# Altium PCB top board.PcbDoc
Units mm, origin at the board's own origin, x right, y up, seen from the top; angles counter-clockwise.
Board outline 77 x 77 mm, 2 copper layers (Top Layer, Bottom Layer); 64 components, 49 nets, 215 pads, 156 vias.
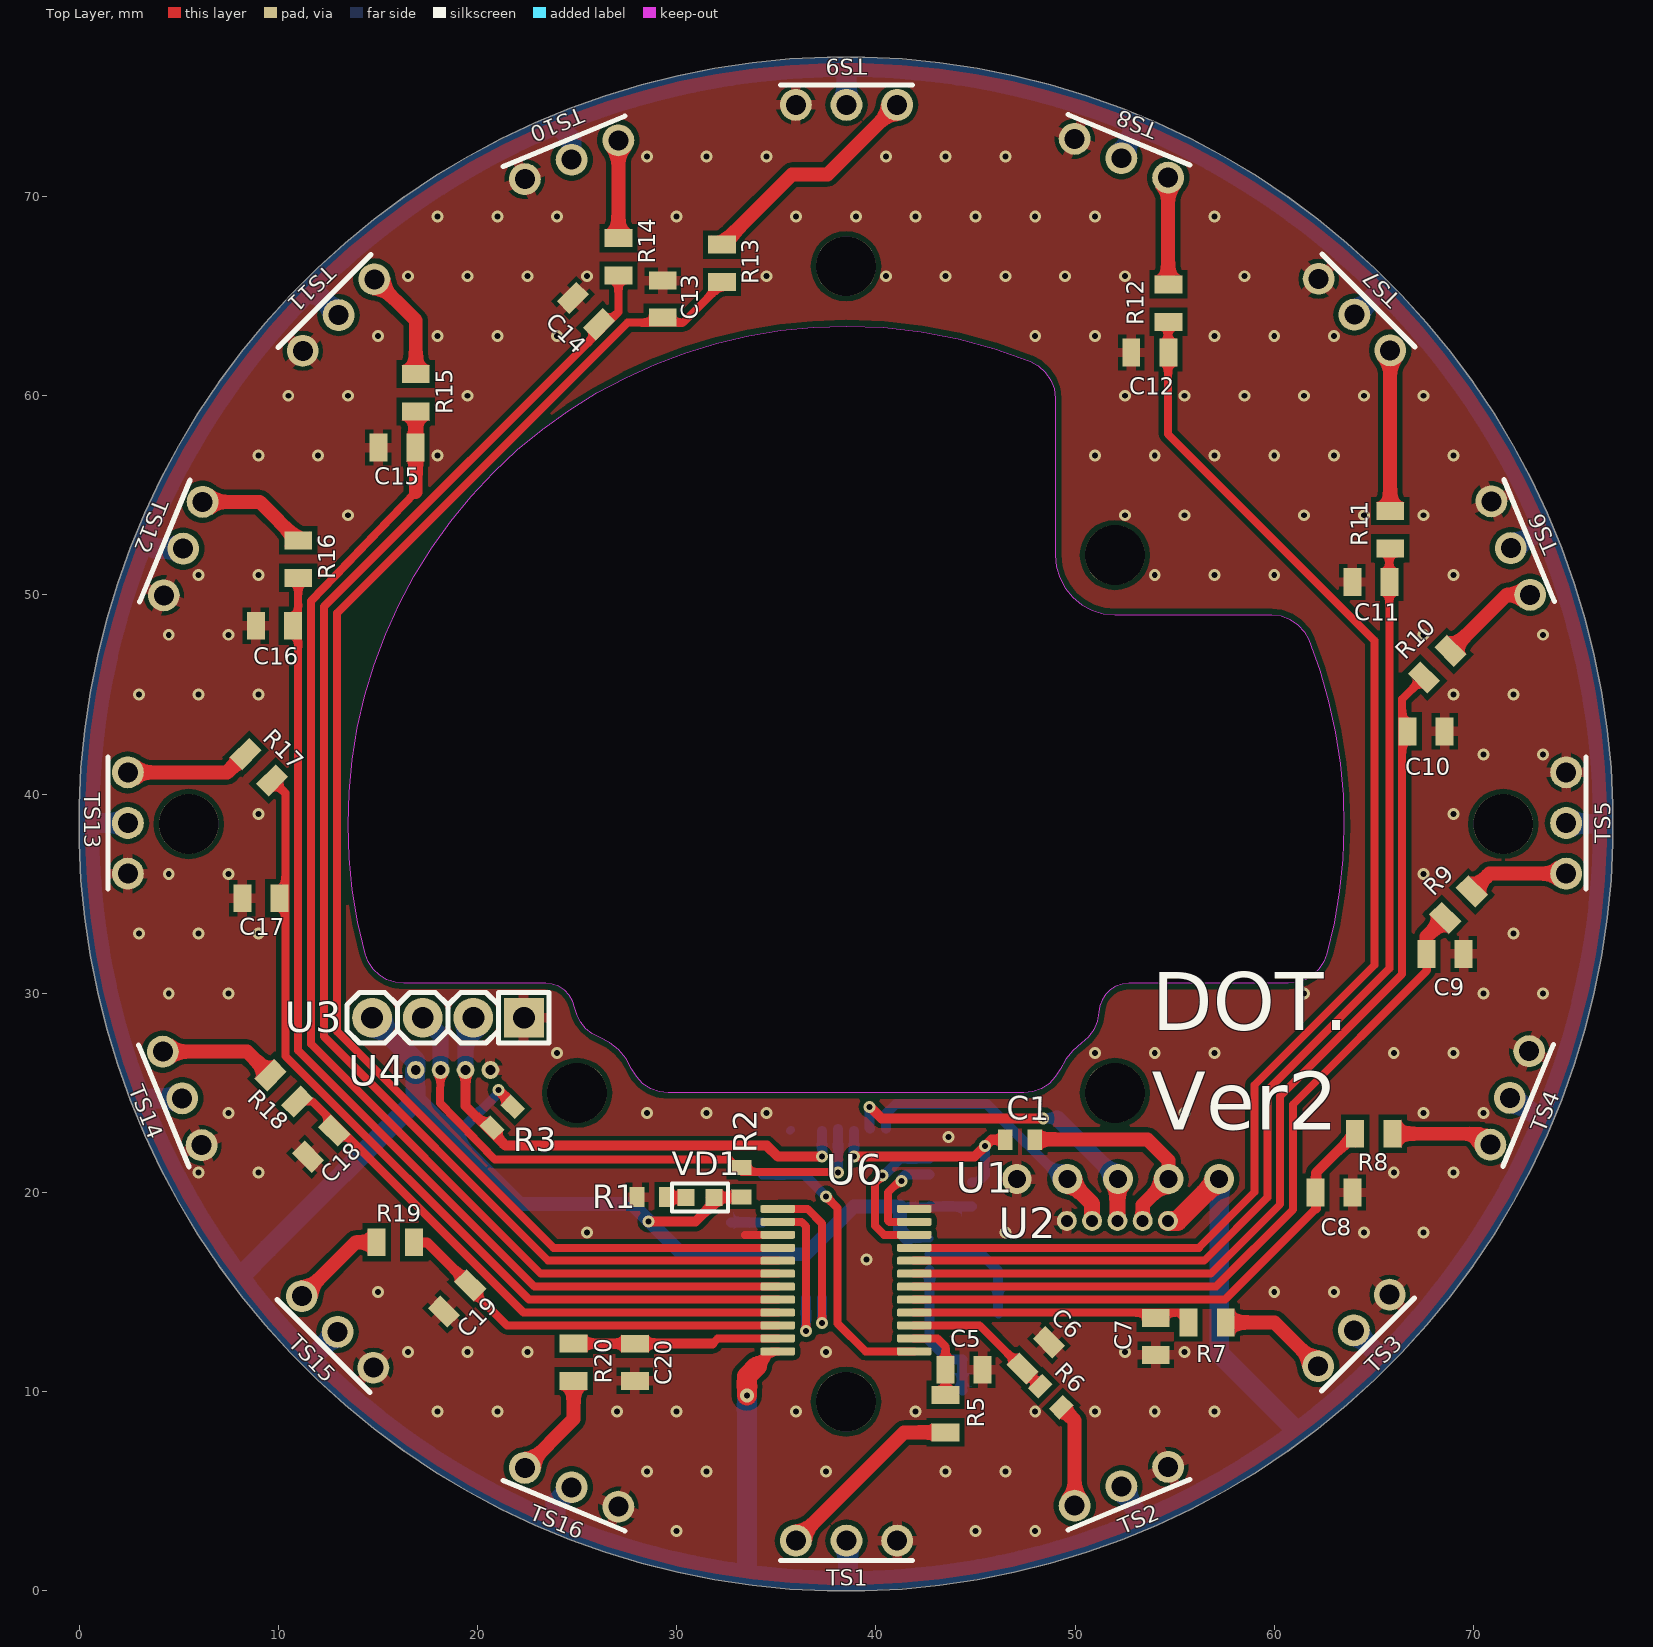
[diagram p0: Top Layer view]
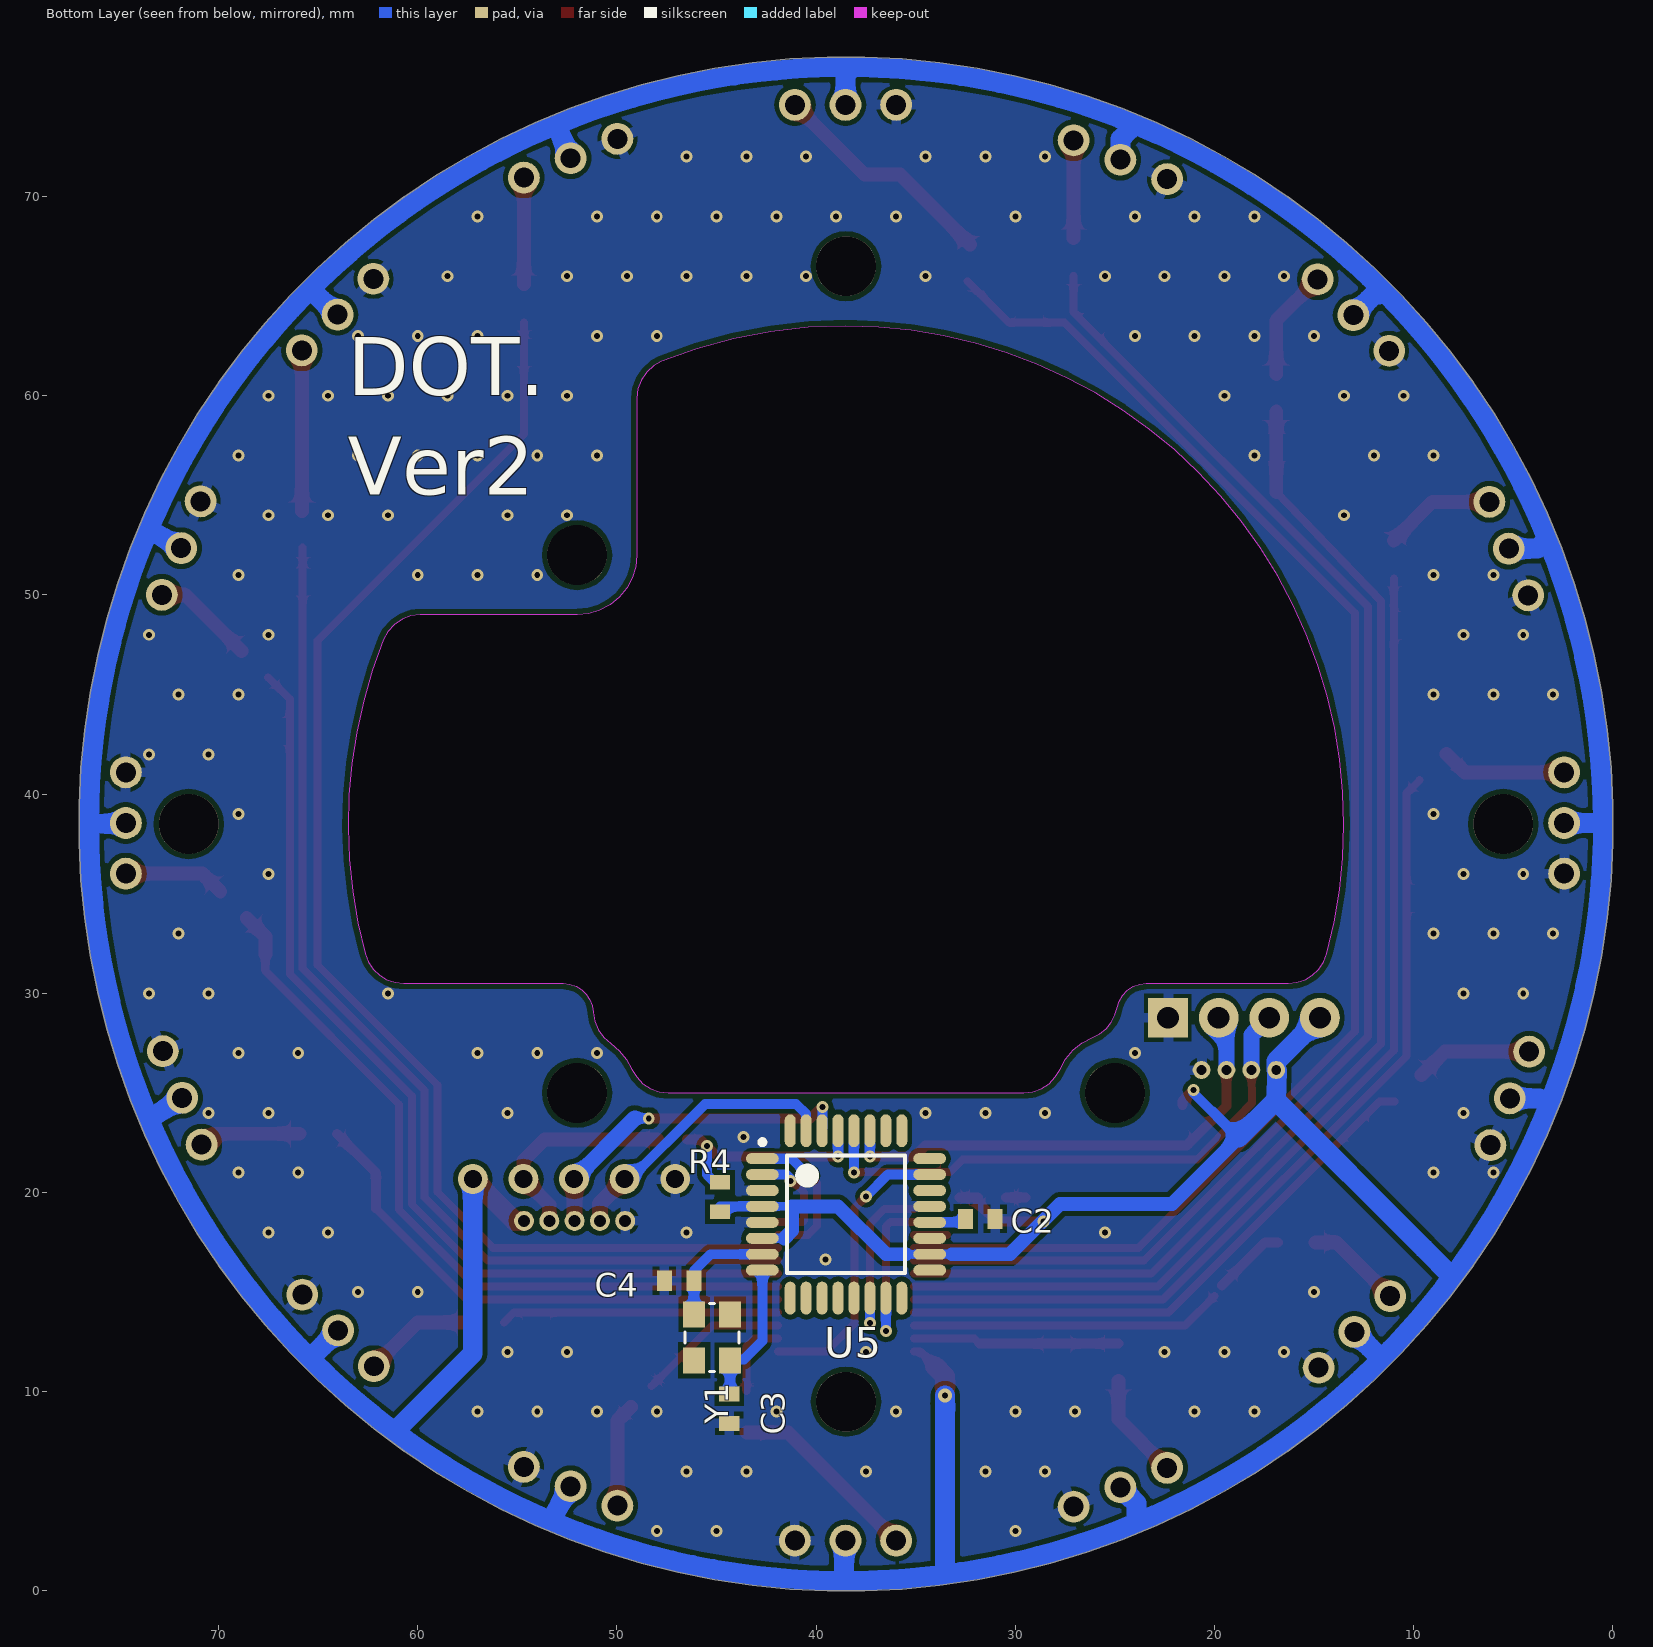
[diagram p1: Bottom Layer view, seen from below]
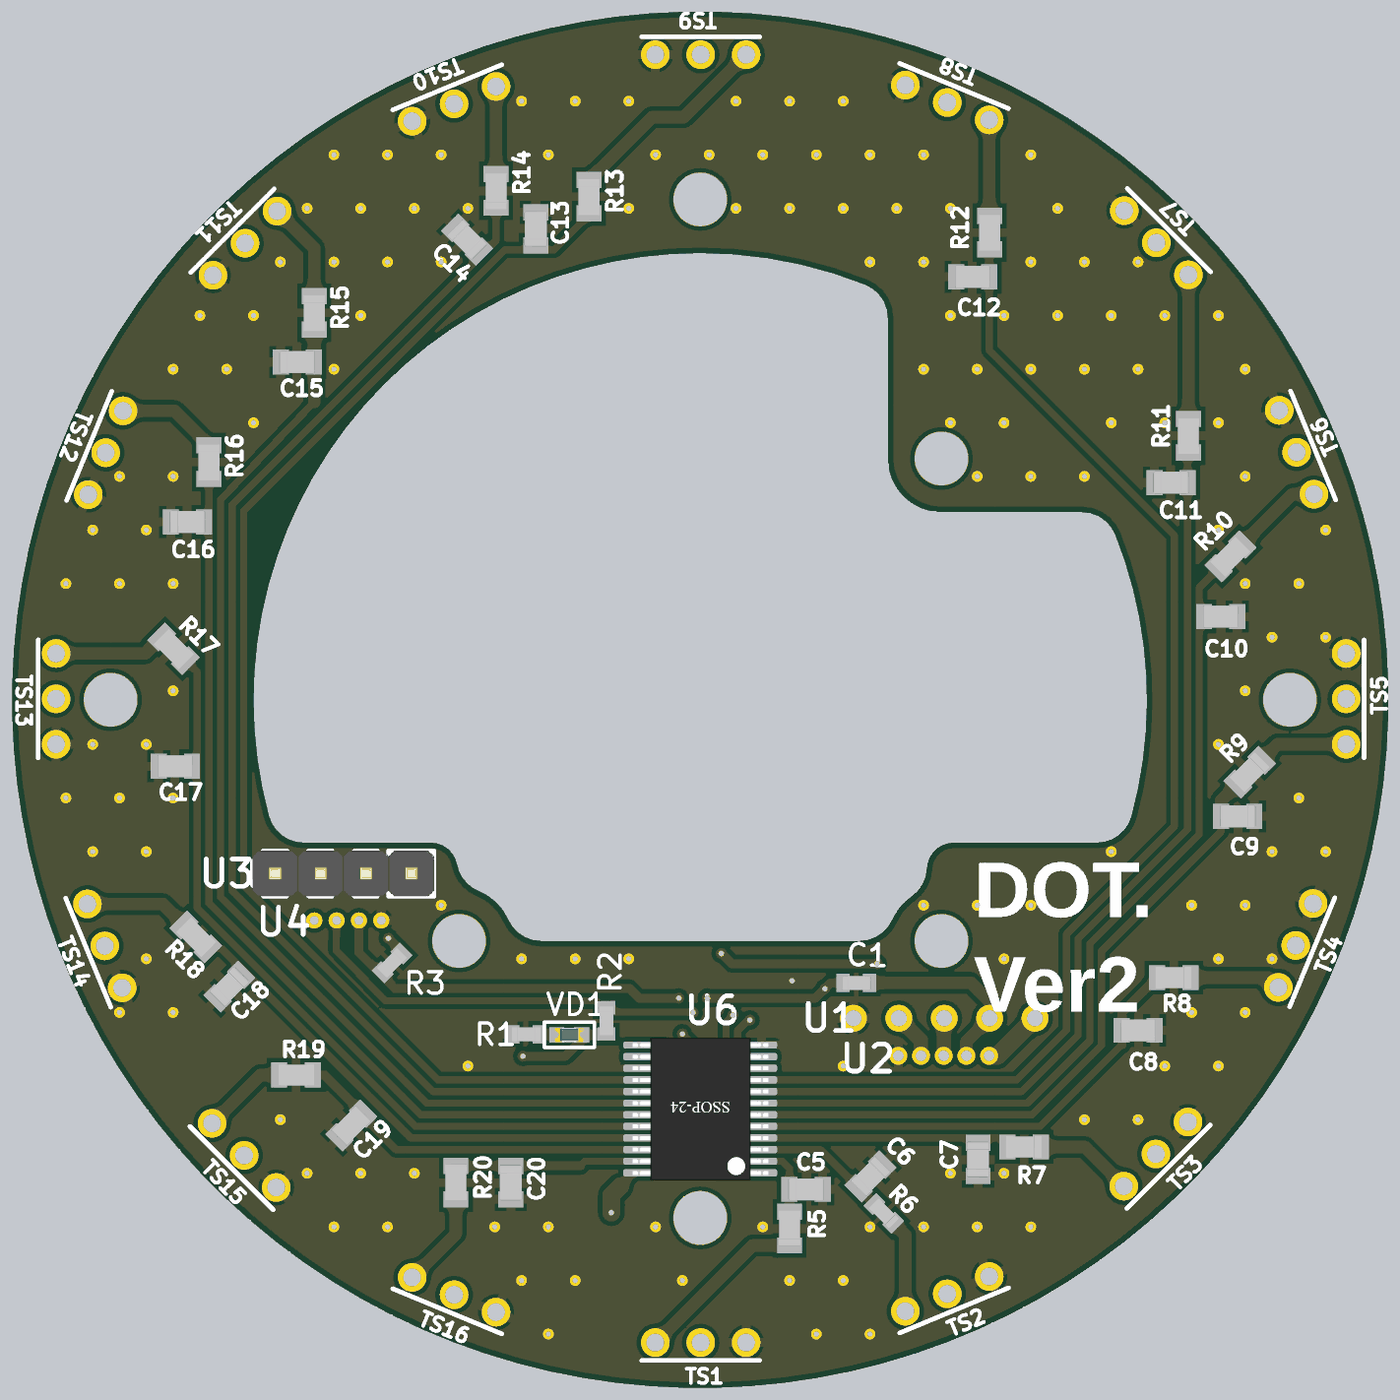
[diagram p2: 3D render of the assembled board from above, using the file's embedded part models]
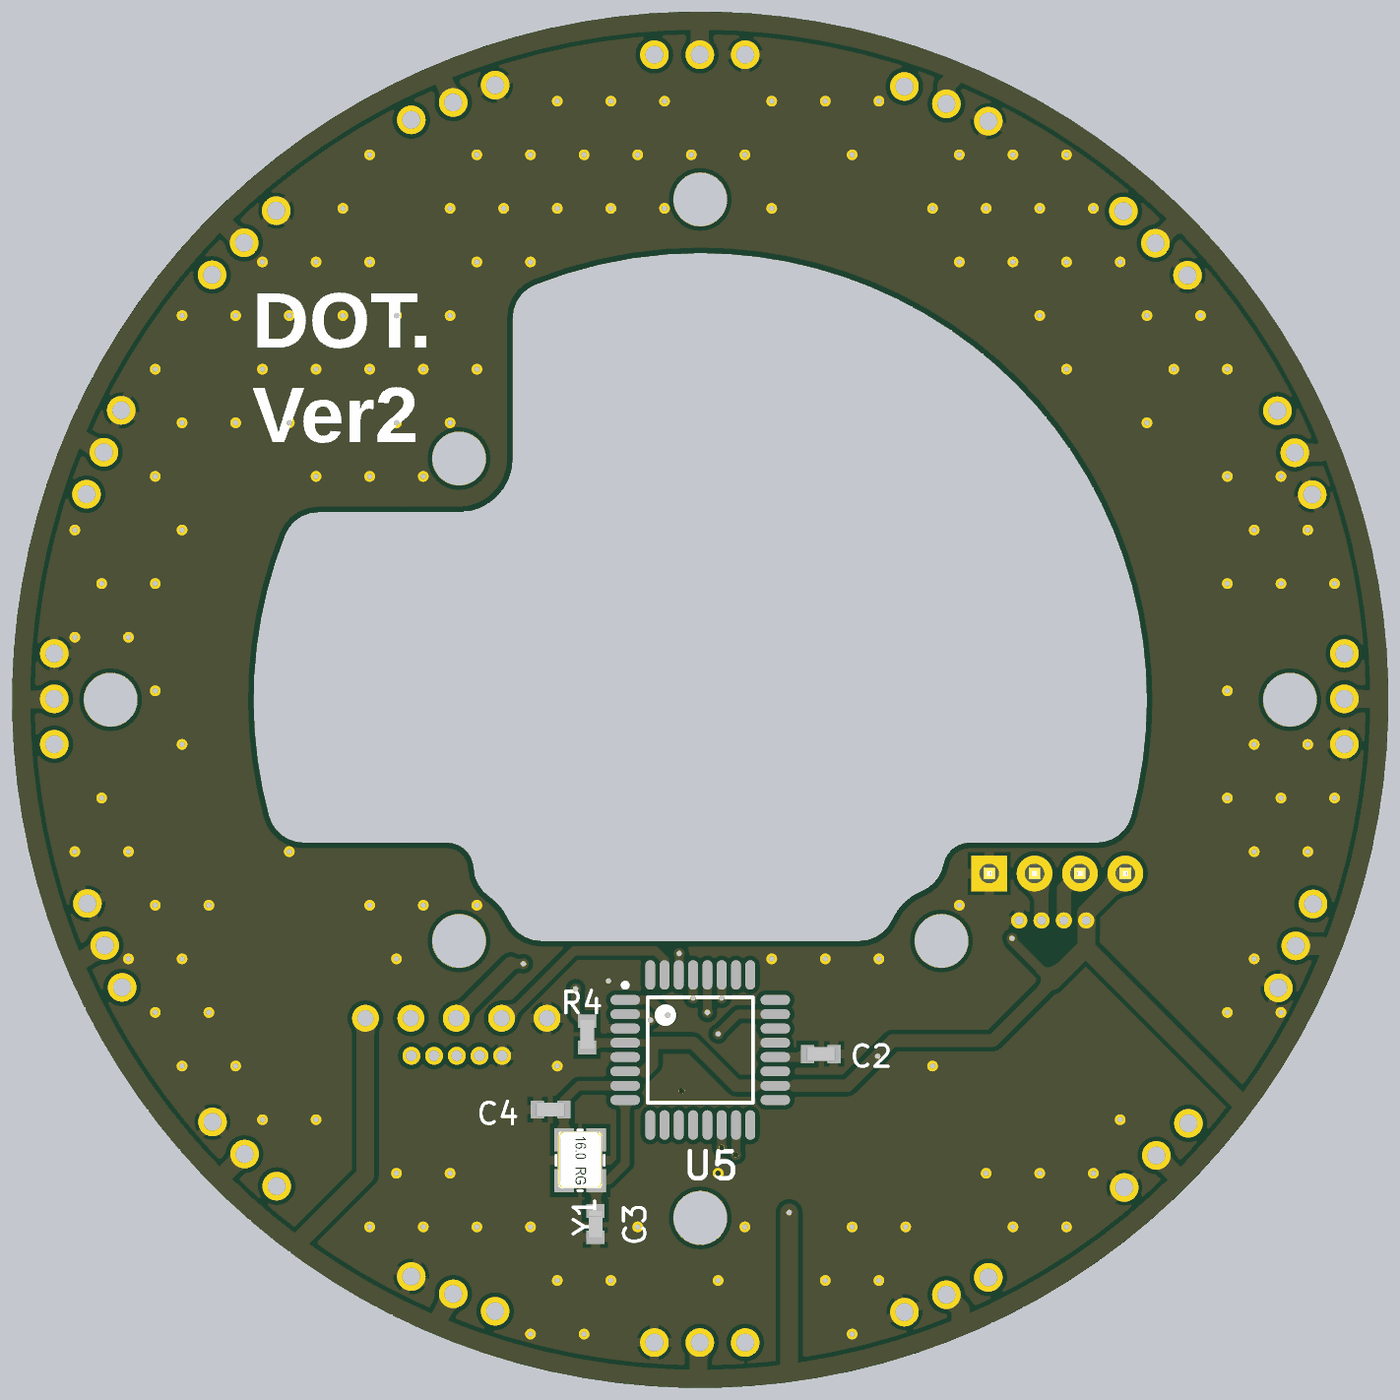
[diagram p3: 3D render of the assembled board from below, using the file's embedded part models]

## Layer stack, top to bottom
Top Solder: solder mask 0.0102, Solder Resist, Dk 3.5
Top Layer: signal copper 0.0356
Dielectric 1: dielectric 0.32, FR-4, Dk 4.8
Bottom Layer: signal copper 0.0356
Bottom Solder: solder mask 0.0102, Solder Resist, Dk 3.5

## Board outline
8.14,14.806 7.013,16.325 5.963,17.896 4.992,19.518 4.1,21.185 3.292,22.894 2.569,24.64 1.932,26.42 1.383,28.228 0.924,30.062 0.555,31.916 0.278,33.786 0.093,35.667 0,37.555 0,38.5 0,39.445 0.093,41.333 0.278,43.214 0.555,45.084 0.924,46.938 1.383,48.772 1.932,50.58 2.569,52.36 3.292,54.106 4.1,55.815 4.992,57.482 5.963,59.104 7.013,60.675 8.14,62.194 9.339,63.655 10.608,65.055 11.945,66.392 13.345,67.661 14.806,68.86 16.325,69.986 17.896,71.037 19.518,72.008 21.185,72.899 22.894,73.708 24.64,74.431 26.42,75.068 28.228,75.617 30.062,76.076 31.916,76.445 33.786,76.722 35.667,76.907 37.555,77 39.445,77 41.333,76.907 43.214,76.722 45.084,76.445 46.938,76.076 48.772,75.617 50.58,75.068 52.36,74.431 54.106,73.708 55.815,72.899 57.482,72.008 59.104,71.037 60.675,69.986 62.194,68.86 63.655,67.661 65.055,66.392 66.392,65.055 67.661,63.655 68.86,62.194 69.986,60.675 71.037,59.104 72.008,57.482 72.899,55.815 73.708,54.106 74.431,52.36 75.068,50.58 75.617,48.772 76.076,46.938 76.445,45.084 76.722,43.214 76.907,41.333 77,39.445 77,37.555 76.907,35.667 76.722,33.786 76.445,31.916 76.076,30.062 75.617,28.228 75.068,26.42 74.431,24.64 73.708,22.894 72.899,21.185 72.008,19.518 71.037,17.896 69.986,16.325 68.86,14.806 67.661,13.345 66.392,11.945 65.055,10.608 63.655,9.339 62.194,8.14 60.675,7.014 59.104,5.963 57.482,4.992 55.815,4.101 54.106,3.292 52.36,2.569 50.58,1.932 48.772,1.383 46.938,0.924 45.084,0.555 43.214,0.278 41.333,0.093 39.445,0 37.555,0 35.667,0.093 33.786,0.278 31.916,0.555 30.062,0.924 28.228,1.383 26.42,1.932 24.64,2.569 22.894,3.292 21.185,4.101 19.518,4.992 17.896,5.963 16.325,7.014 14.806,8.14 13.345,9.339 11.945,10.608 10.608,11.945 9.339,13.345
cut-out: 27.75,26.2 27.465,26.71 27.088,27.154 26.631,27.518 26.113,27.786 25.757,27.972 25.445,28.225 25.19,28.535 25.002,28.89 24.889,29.276 24.787,29.606 24.612,29.904 24.373,30.154 24.083,30.343 23.758,30.46 23.415,30.5 16.296,30.5 15.864,30.547 15.452,30.687 15.081,30.912 14.766,31.212 14.524,31.573 14.366,31.978 13.99,33.573 13.72,35.188 13.557,36.818 13.5,38.454 13.551,40.092 13.708,41.722 13.973,43.338 14.342,44.934 14.815,46.502 15.39,48.036 16.064,49.528 16.834,50.974 17.697,52.366 18.65,53.698 19.688,54.965 20.806,56.162 22.001,57.282 23.266,58.322 24.597,59.277 25.987,60.143 27.431,60.916 28.922,61.593 30.455,62.17 32.022,62.646 33.617,63.019 35.233,63.286 36.863,63.446 38.5,63.5 40.391,63.428 42.271,63.214 44.129,62.858 45.956,62.362 47.739,61.73 48.157,61.503 48.51,61.183 48.777,60.79 48.943,60.344 49,59.872 49,52 49.058,51.415 49.228,50.852 49.506,50.333 49.879,49.879 50.333,49.506 50.852,49.228 51.415,49.058 52,49 59.872,49 60.344,48.943 60.79,48.777 61.183,48.51 61.503,48.157 61.73,47.739 62.275,46.229 62.723,44.686 63.07,43.118 63.316,41.531 63.459,39.932 63.499,38.327 63.437,36.722 63.271,35.125 63.003,33.541 62.634,31.978 62.476,31.573 62.234,31.212 61.919,30.912 61.548,30.687 61.136,30.547 60.704,30.5 52.685,30.5 52.36,30.464 52.049,30.359 51.77,30.188 51.533,29.961 51.352,29.688 51.235,29.382 51.187,29.058 51.114,28.597 50.937,28.165 50.665,27.786 50.313,27.481 49.88,27.123 49.522,26.691 49.25,26.2 49.018,25.8 48.699,25.465 48.312,25.211 47.877,25.054 47.417,25 29.583,25 29.123,25.054 28.688,25.211 28.301,25.465 27.982,25.8

## Design rules (kind name [scope] priority, off if disabled: settings)
BoardOutlineClearance [All] p1: gap=0.3 ignorepadtopadclearanceinfootprint=FALSE
Clearance Clearance_MultiLayerPad [OnLayer('Multi-Layer') and IsPad] p1: gap=0.25 ignorepadtopadclearanceinfootprint=FALSE except(0: Arc-Hole Track-Hole SMDPad-Hole THPad-Hole Via-Hole Fill-Hole Poly-Hole Region-Hole Text-Hole)
Clearance Clearance_Polygon [InPolygon] p2: gap=0.25 ignorepadtopadclearanceinfootprint=FALSE
Clearance [All] p3: gap=0.25 ignorepadtopadclearanceinfootprint=TRUE
ComponentClearance [All] p1: gap=0 collisioncheckmode=3 verticalgap=0 showdistances=FALSE
HoleToHoleClearance [All] p1: gap=0.2 allowstackedmicrovias=TRUE
MinimumSolderMaskSliver [All] p1: minsoldermaskwidth=0.2
PlaneClearance [All] p1: clearance=0.5
PlaneConnect [All] p1: planeconnectstyle=Relief reliefexpansion=0.5 reliefentries=4 reliefconductorwidth=0.3 reliefairgap=0.2
PolygonConnect PolygonConnect_PadGND [InNet('GND') and IsPad] p1: connectstyle=Relief reliefconductorwidth=0.5 reliefentries=4 polygonreliefangle="90 Angle" airgapwidth=0.2
PolygonConnect PolygonConnect_Via [IsVia] p2: connectstyle=Direct reliefconductorwidth=0.254 reliefentries=4 polygonreliefangle="90 Angle" airgapwidth=0.254
PolygonConnect [All] p3: connectstyle=Relief reliefconductorwidth=0.3 reliefentries=4 polygonreliefangle="90 Angle" airgapwidth=0.2
RoutingVias [All] p1: holewidth=0.3 width=0.7 viastyle="Through Hole" minholewidth=0.2 minwidth=0.4 maxholewidth=1 maxwidth=2
SilkToSolderMaskClearance [IsPad] p1: minsilkscreentomaskgap=0.2 clearancetoexposedcopper=TRUE
SolderMaskExpansion [All] p1: expansion=0
UnRoutedNet [All] p1: checkbadconnections=TRUE
Width [All] p1: maxlimit=10 minlimit=0.15 preferedwidth=0.15
23 further rules are at their usual default settings.

## Classes and differential pairs
component class U_Sensors: C5 C6 C7 C8 C9 C10 C11 C12 C13 C14 C15 C16 C17 C18 C19 C20 R5 R6 R7 R8 R9 R10 R11 R12 R13 R14 R15 R16 R17 R18 R19 R20 TS1 TS2 TS3 TS4 TS5 TS6 TS7 TS8 TS9 TS10 TS11 TS12 TS13 TS14 TS15 TS16 U6
component class MK: C1 C2 C3 C4 R1 R2 R3 R4 U1 U2 U3 U4 U5 VD1 Y1

## Components (designator, comment, footprint, x,y, rotation, side; value= is the part's Value field where it differs from the comment)
C1 "0.1uF" cap0603 47.235,22.65 r180 top
C2 "0.1uF" cap0603 31.75,18.675 r0 bottom
C3 "22p" cap0603 44.36,9.15 r270 bottom
C4 "22p" cap0603 46.875,15.566 r0 bottom
C5 "Value" cap0805 44.425,11.1 r180 top
C6 "Value" cap0805 48.025,11.825 r225 top
C7 "Value" cap0805 54.05,12.775 r90 top
C8 "Value" cap0805 63.003,20 r180 top
C9 "Value" cap0805 68.575,31.975 r180 top
C10 "Value" cap0805 67.625,43.15 r180 top
C11 "Value" cap0805 64.85,50.65 r0 top
C12 "Value" cap0805 53.75,62.17 r0 top
C13 "Value" cap0805 29.3,64.85 r270 top
C14 "Value" cap0805 25.45,64.25 r315 top
C15 "Value" cap0805 15.95,57.4 r0 top
C16 "Value" cap0805 9.8,48.45 r0 top
C17 "Value" cap0805 9.122,34.775 r0 top
C18 "Value" cap0805 12.15,22.45 r45 top
C19 "Value" cap0805 18.975,14.675 r45 top
C20 "Value" cap0805 27.9,11.475 r90 top
R1 "1.5k" res0603 28.75,19.775 r180 top
R2 "4.7k" res0603 33.25,20.525 r270 top
R3 "4.7k" res0603 21.25,23.775 r45 top
R4 "10k" res0603 44.825,19.775 r270 bottom
R5 "Value" res0805 43.5,8.9 r270 top
R6 "Value" res0603 48.775,9.75 r315 top
R7 "Value" res0805 56.625,13.475 r0 top
R8 "Value" res0805 65,22.95 r0 top
R9 "Value" res0805 69.25,34.45 r45 top
R10 "Value" res0805 68.175,46.525 r45 top
R11 "Value" res0805 65.821,53.275 r90 top
R12 "Value" res0805 54.695,64.65 r90 top
R13 "Value" res0805 32.275,66.65 r90 top
R14 "Value" res0805 27.075,66.975 r90 top
R15 "Value" res0805 16.9,60.15 r90 top
R16 "Value" res0805 11,51.8 r90 top
R17 "Value" res0805 9.025,41.35 r135 top
R18 "Value" res0805 10.275,25.225 r135 top
R19 "Value" res0805 15.875,17.5 r180 top
R20 "Value" res0805 24.825,11.475 r270 top
TS1 "TSOP2240" TSOP2240#1 38.525,2.525 r0 top
TS2 "TSOP2240" TSOP2240#1 52.325,5.25 r22.5 top
TS3 "TSOP2240" TSOP2240#1 64,13.075 r45 top
TS4 "TSOP2240" TSOP2240#1 71.825,24.75 r67.5 top
TS5 "TSOP2240" TSOP2240#1 74.65,38.55 r90 top
TS6 "TSOP2240" TSOP2240#1 71.875,52.35 r112.5 top
TS7 "TSOP2240" TSOP2240#1 64.025,64.075 r135 top
TS8 "TSOP2240" TSOP2240#1 52.325,71.925 r157.5 top
TS9 "TSOP2240" TSOP2240#1 38.525,74.6 r180 top
TS10 "TSOP2240" TSOP2240#1 24.725,71.85 r202.5 top
TS11 "TSOP2240" TSOP2240#1 13.025,64.05 r225 top
TS12 "TSOP2240" TSOP2240#1 5.225,52.325 r247.5 top
TS13 "TSOP2240" TSOP2240#1 2.45,38.55 r270 top
TS14 "TSOP2240" TSOP2240#2 5.175,24.725 r292.5 top locked
TS15 "TSOP2240" TSOP2240#1 12.975,13 r315 top
TS16 "TSOP2240" TSOP2240#1 24.725,5.2 r337.5 top
U1 "Header 5" 5x2.54 52.155,20.675 r0 top
U2 "Header 5" 5x1.27 52.125,18.575 r0 top
U3 "Header 4" "CON: PLS-4" 18.52,28.775 r180 top
U4 "Header 4" 4x1.25 18.775,26.15 r180 top
U5 "ATmega328P-AUR" 32A_N 38.5,18.9 r180 bottom locked
U6 "Multifleksor" SSOP-24 38.5,15.6 r180 top
VD1 "*" CH0603LB 31.171,19.75 r180 top
Y1 "=Value" QSMD3.2x2.5_A 45.225,12.725 r90 bottom

## Footprints (in the part's own frame and the unit in brackets; to place one, negate y for a bottom-side part, rotate by r counter-clockwise, add the part's x,y. Pads: shape width x height; smd on the part's side, far side on the other; paste and mask are expansions set on the pad)
4x1.25 [mm]
  round 0.9 hole 0.5: 1(-1.875,0) 2(-0.625,0) 3(0.625,0) 4(1.875,0)
5x1.27 [mm]
  round 1 hole 0.6: 1(-2.54,0) 2(-1.27,0) 3(0,0) 4(1.27,0) 5(2.54,0)
5x2.54 [mm]
  round 1.5 hole 0.9: 1(-5.08,0) 2(-2.54,0) 3(0,0) 4(2.54,0) 5(5.08,0)
32A_N [mm] "Thin QFP, 32-Leads, Body 7x7mm, Pitch 0.8mm, IPC Medium Density"
  oval 1.65x0.55 smd: 1(-4.2,2.8) 2(-4.2,2) 3(-4.2,1.2) 4(-4.2,0.4) 5(-4.2,-0.4) 6(-4.2,-1.2) 7(-4.2,-2) 8(-4.2,-2.8) 17(4.2,-2.8) 18(4.2,-2) 19(4.2,-1.2) 20(4.2,-0.4) 21(4.2,0.4) 22(4.2,1.2) 23(4.2,2) 24(4.2,2.8)
  oval 0.55x1.65 smd: 9(-2.8,-4.2) 10(-2,-4.2) 11(-1.2,-4.2) 12(-0.4,-4.2) 13(0.4,-4.2) 14(1.2,-4.2) 15(2,-4.2) 16(2.8,-4.2) 25(2.8,4.2) 26(2,4.2) 27(1.2,4.2) 28(0.4,4.2) 29(-0.4,4.2) 30(-1.2,4.2) 31(-2,4.2) 32(-2.8,4.2)
  silkscreen extent -4.33,-2.95 2.95,3.75, body extent -3.5,-3.5 3.5,3.5, height 1.2
cap0603 [mm]
  rect 0.75x1.016 smd: 1(-0.74,0) 2(0.74,0)
  body extent -0.8,-0.4 0.8,0.4, height 0.88
cap0805 [mm]
  rect 0.9x1.397 smd: 1(-0.93,0) 2(0.93,0)
  body extent -1,-0.63 1,0.64, height 1.24
CH0603LB [mm] "Chip Capacitor, 2-Leads, Body 1,53x0,85mm, IPC Medium Density"
  rect 0.85x0.85 smd: 1(-0.7,0) 2(0.7,0)
  silkscreen extent -1.4,-0.7 1.4,0.7, body extent -0.8,-0.4 0.8,0.4, height 0.6
"CON: PLS-4" [mm] "PLS-40 4 pin header"
  rect 2x2 hole 1.1: 1(-3.81,0)
  round 2 hole 1.1: 2(-1.27,0) 3(1.27,0) 4(3.81,0)
  silkscreen extent -5.08,-1.27 5.08,1.27, body extent -5.08,-1.27 5.08,1.27, height 8.54
QSMD3.2x2.5_A [mm]
  rect 1.3x1.1 smd: 1(-1.15,-0.9) 2(1.15,0.9) ""(-1.15,0.9) ""(1.15,-0.9)
  silkscreen extent -1.7,-1.35 1.7,1.35, body extent -1.58,-1.25 1.63,1.25, height 0.81
res0603 [mm]
  rect 0.75x1.016 smd: 1(-0.74,0) 2(0.74,0)
  body extent -0.8,-0.4 0.8,0.4, height 0.49
res0805 [mm]
  rect 0.9x1.397 smd: 1(-0.94,0) 2(0.94,0)
  body extent -1.02,-0.6 0.98,0.6, height 0.49
SSOP-24 [mm]
  rrect50% 1.75x0.4 smd: 1(-3.425,3.575) 2(-3.425,2.925) 3(-3.425,2.275) 4(-3.425,1.625) 5(-3.425,0.975) 6(-3.425,0.325) 7(-3.425,-0.325) 8(-3.425,-0.975) 9(-3.425,-1.625) 10(-3.425,-2.275) 11(-3.425,-2.925) 12(-3.425,-3.575) 13(3.425,-3.575) 14(3.425,-2.925) 15(3.425,-2.275) 16(3.425,-1.625) 17(3.425,-0.975) 18(3.425,-0.325) 19(3.425,0.325) 20(3.425,0.975) 21(3.425,1.625) 22(3.425,2.275) 23(3.425,2.925) 24(3.425,3.575)
  body extent -3.81,-4 3.79,4, height 1.25
TSOP2240#1 [mm]
  round 1.6 hole 1: 1(-2.54,0) 2(0,0) 3(2.54,0)
  silkscreen extent -3.3,-1 3.3,-1
TSOP2240#2 [mm]
  round 1.6 hole 1: 1(-2.54,0) 2(0,0)
  round 1.6 hole 1 unplated: 3(2.54,0)
  silkscreen extent -3.3,-1 3.3,-1

## Part data
C1 C2 C3 C4 C5 C6 C7 C8 C9 C10 C11 C12 C13 C14 C15 C16 C17 C18 C19 C20: library part "Cap SMD"
R1 R2 R3 R4 R5 R6 R7 R8 R9 R10 R11 R12 R13 R14 R15 R16 R17 R18 R19 R20: library part "Resistor SMD"
U5: "8-bit AVR Microcontroller, 32KB Flash, 1KB EEPROM, 2KB SRAM, 32-pin TQFP, Industrial Grade (-40°C to 85°C)", Supplier Part Number 1=ATMEGA328P-AUR-ND, Code_JEDEC=MS-026-ABA, ComponentLink1Description="Manufacturer Link", ComponentLink1URL=http://www.atmel.com/products/avr/default.asp?, ComponentLink2Description="ATmega48A/48PA/88A/88PA/168A/168PA/328/328P Datasheet", ComponentLink2URL=http://www.atmel.com/dyn/resources/prod_documents/8271.pdf, ComponentLink3Description="ATmega48A/48PA/88A/88PA/168A/168PA/328/328P Summary", ComponentLink3URL=http://www.atmel.com/dyn/resources/prod_documents/8271S.pdf, ComponentLink4Description="Atmel.com Home", ComponentLink4URL=http://www.atmel.com, DatasheetVersion="revA, Jan-2010", PackageDescription="32-Lead, 7x7x1.0 mm Body, 0.8mm Lead Pitch, Thin Profile Plastic Quad Flat Package (TQFP)", PackageReference=32A, PackageVersion="revB, Oct-2001", Published=1-Apr-2010, Publisher="Altium Limited", Supplier 1=Digi-Key, Supplier 2=Mouser, Supplier Part Number 2=556-ATMEGA328P-AUR
VD1: library part LED
Y1: library part Quartz

## Free pads (board coordinates)
  round 3 hole 3: 1(5.5,38.5) 1(25,25) 1(38.5,9.5) 1(38.5,66.5) 1(52,25) 1(52,52) 1(71.5,38.5)

## Via types
v1: diameter 0.6, hole 0.3, Top Layer to Bottom Layer, 155 vias
v2: diameter 0.7, hole 0.3, Top Layer to Bottom Layer, tented both sides, 1 vias

## Nets (pads, with @x,y where several pads share a name; then routed paths per layer and width w, separated by ;. In a path a pad name is that pad's centre, name@x,y a point inside that pad or via, vN(x,y) a via of type N, cw(c..) or ccw(c..) an arc to the next point about the centre after c; other vN are vias at no path point)
1S: C5.2 R5.1 U6.2 | length 4
  Top Layer w0.4: U6.2 43.1,12.675 43.5,12.275 R5.1@43.5,10.04
2S: C6.2 R6.1 U6.3 | length 7.6
  Top Layer w0.4: U6.3 45.21,13.325 R6.1@48.257,10.278
3S: C7.2 R7.1 U6.4 | length 14
  Top Layer w0.4: U6.4 55.175,13.975 R7.1@55.675,13.475
4S: C8.2 R8.1 U6.5 | length 26.6
  Top Layer w0.4: U6.5 57.531,14.625 62.1,19.194
  Top Layer w0.5: 62.1,19.194 62.1,20.99 R8.1
5S: C9.2 R9.1 U6.6 | length 38.4
  Top Layer w0.4: U6.6 57.081,15.275 60.95,19.144 60.95,24.425 67.645,31.12 C9.2
  Top Layer w0.7: C9.2 67.645,32.845 R9.1
6S: C10.2 R10.1 U6.7 | length 49.3
  Top Layer w0.4: U6.7 56.812,15.925 60.3,19.413 60.3,24.849 66.425,30.974 66.425,44.775 R10.1
7S: C11.2 R11.1 U6.8 | length 54.2
  Top Layer w0.4: U6.8 53.123,16.575 56.481,16.575 59.65,19.744 59.65,25.119 65.775,31.244 R11.1@65.775,52.375
8S: C12.2 R12.1 U6.9 | length 68.7
  Top Layer w0.4: U6.9 56.212,17.225 59,20.013 59,25.388 65.025,31.413 65.025,47.715 54.672,58.068 R12.1@54.672,63.675
9S: C13.2 R13.1 U6.16 | length 74
  Top Layer w0.4: R13.1@32.398,65.748 30.325,63.675 27.542,63.675 12.95,49.083 12.95,28.094 23.819,17.225 U6.16
10S: C14.2 R14.1 U6.17 | length 71.8
  Top Layer w0.4: R14.1@27.072,66.025 27.072,64.197 12.3,49.425 12.3,27.825 23.55,16.575 U6.17
11S: C15.2 R15.1 U6.18 | length 62.1
  Top Layer w0.4: 16.9,55.169 11.65,49.694 11.65,27.45 23.175,15.925 U6.18
  Top Layer w0.7: 16.9,55.169 R15.1
12S: C16.2 R16.1 U6.19 | length 52.7
  Top Layer w0.4: R16.1@11,50.825 11,27.125 22.85,15.275 U6.19
13S: C17.2 R17.1 U6.20 | length 43.9
  Top Layer w0.4: R17.1@9.7,40.7 10.35,40.05 10.35,26.856 22.581,14.625 U6.20
14S: C18.2 R18.1 U6.21 | length 28.5
  Top Layer w0.4: R18.1@10.95,24.575 11.712,24.575 22.312,13.975 U6.21
15S: C19.2 R19.1 U6.22 | length 19.4
  Top Layer w0.4: C19.2@20.004,14.796 21.475,13.325 U6.22
  Top Layer w0.5: R19.1 17.465,17.5 C19.2
16S: C20.2 R20.1 U6.23 | length 10.4
  Top Layer w0.4: 31.8,12.415 32.06,12.675 U6.23
  Top Layer w0.5: R20.1 31.8,12.415
+5: R2.2 R3.2 R4.2 TS1.2 TS2.2 TS3.2 TS4.2 TS5.2 TS6.2 TS7.2 TS8.2 TS9.2 TS10.2 TS11.2 TS12.2 TS13.2 TS14.2 TS15.2 TS16.2 U1.5 U2.5 U3.4 U4.4 U5.4 U5.6 U5.18 U6.24 VD1.1 | length 356.6
  Top Layer w0.4: 34.025,11.275 34.775,12.025 U6.24
  Top Layer w0.5: v1(21.05,25.15) 21.598,24.602 R3.2@21.598,24.38 ; v1(28.575,18.55) 30.95,18.55 31.871,19.471 VD1.1 R2.2@32.81,19.75
  Top Layer w1: v2(33.525,9.8) 33.525,10.775 34.025,11.275 ; U2.5 55.135,18.575 U1.5
  Bottom Layer w0.4: 33.175,16.9 U5.18 35.475,16.9 ; 41.3,19.3 U5.4 ; 41.6,17.7 U5.6
  Bottom Layer w0.5: 16.9,24.601 16.976,24.525 ; 18.801,22.751 21.05,25 v1(21.05,25.15) ; U5.4 R4.2@44.825,19.3
  Bottom Layer w0.7: 18.801,22.751 22.127,19.425 27.75,19.425 30.275,16.9 33.175,16.9 ; 35.475,16.9 36.5,16.9 38.9,19.3 41.2,19.3 41.2,18.1 41.6,17.7
  Bottom Layer w1: 0.8,38.55 TS13.2 ; 3.529,52.588 3.792,52.325 TS12.2 ; 3.675,24.725 TS14.2 ; 8.091,15.787 9.488,17.185 9.488,17.19 16.9,24.601 U4.4@16.87,26.13 ; 11.754,65.07 12.005,65.07 TS11.2 ; 11.804,11.88 11.855,11.88 TS15.2 ; U3.4@14.31,28.8 14.688,28.8 16.9,26.588 U4.4 ; 16.976,24.525 17.027,24.525 18.801,22.751 ; 24.169,3.306 ccw(c38.5,38.5) 34.708,0.69 ccw(c38.5,38.5) 47.245,1.52 ccw(c38.5,38.5) 51.013,2.619 ccw(c38.5,38.5) 51.915,2.947 ccw(c38.5,38.5) 60.362,7.419 ccw(c38.5,38.5) 60.646,7.62 ccw(c38.5,38.5) 66.656,12.98 ccw(c38.5,38.5) 70.737,18.381 ccw(c38.5,38.5) 74.592,26.61 ccw(c38.5,38.5) 76.5,38.5 ccw(c38.5,38.5) 75.58,46.813 ccw(c38.5,38.5) 74.334,51.147 ccw(c38.5,38.5) 68.988,61.182 ccw(c38.5,38.5) 58.376,70.887 ccw(c38.5,38.5) 56.026,72.217 ccw(c38.5,38.5) 34.698,76.309 ccw(c38.5,38.5) 29.819,75.495 ccw(c38.5,38.5) 21.844,72.655 ccw(c38.5,38.5) 9.994,63.628 ccw(c38.5,38.5) 6.018,58.221 ccw(c38.5,38.5) 1.936,48.847 ccw(c38.5,38.5) 1.7,47.975 ccw(c38.5,38.5) 0.642,41.778 ccw(c38.5,38.5) 0.611,35.6 ccw(c38.5,38.5) 0.677,34.834 ccw(c38.5,38.5) 1.611,29.377 ccw(c38.5,38.5) 7.877,16.001 ccw(c38.5,38.5) 11.159,12.109 ccw(c38.5,38.5) 23.925,3.406 23.925,4.4 TS16.2 ; 24.268,73.337 24.725,72.88 TS10.2 ; 33.525,0.875 v2(33.525,9.8) ; 38.425,76.2 38.525,76.1 TS9.2 ; 38.55,0.8 38.6,0.85 TS1.2@38.6,2.4 ; TS8.2 52.903,73.254 ; TS2.2@52.35,5.25 53.18,3.774 ; U1.5@57.24,20.4 57.24,11.913 60.953,8.2 ; TS3.2 65.3,11.775 65.475,11.775 ; TS7.2 65.183,65.133 ; TS4.2 73.234,23.841 ; TS6.2 73.239,53.147 ; TS5.2 76.2,38.5
A1: U5.2 U6.11 | length 5.3
  Top Layer w0.4: v1(41.275,20.575) 41.175,20.575 40.6,20 40.6,18.6 40.675,18.525 U6.11
  Bottom Layer w0.5: v1(41.275,20.575) 41.275,20.675 41.5,20.9 U5.2
A2: U5.1 U6.10 | length 7.6
  Top Layer w0.4: v1(40.325,20.85) 39.95,20.475 39.95,18.331 40.406,17.875 U6.10
  Bottom Layer w0.5: v1(40.325,20.85) 40.4,20.85 40.525,20.975 40.525,20.986 41.239,21.7 U5.1
A3: U5.15 U6.14 | length 8.4
  Top Layer w0.4: U6.14 36.275,18.525 36.5,18.3 v1(36.5,13.038)
  Bottom Layer w0.5: v1(36.5,13.038) U5.15
A4: U5.14 U6.13 | length 8.8
  Top Layer w0.4: U6.13 36.575,19.175 37.3,18.45 v1(37.3,13.44)
  Bottom Layer w0.5: v1(37.3,13.44) U5.14
AREF: C2.2 U5.20 | length 1.6
  Bottom Layer w0.5: C2.2@32.73,18.5 U5.20
GND: C2.1 C3.2 C4.2 C5.1 C6.1 C7.1 C8.1 C9.1 C10.1 C11.1 C12.1 C13.1 C14.1 C15.1 C16.1 C17.1 C18.1 C19.1 C20.1 R1.2 TS1.3 TS2.3 TS3.3 TS4.3 TS5.3 TS6.3 TS7.3 TS8.3 TS9.3 TS10.3 TS11.3 TS12.3 TS13.3 TS14.3 TS15.3 TS16.3 U1.1 U2.1 U3.1 U4.1 U5.3 U5.5 U5.21 U6.12 U6.15 | length 1.6
  Top Layer w0.4: 33.425,17.875 U6.15
  other v1: 30,3 45,3 48,3 28.5,6 31.5,6 37.5,6 43.5,6 46.5,6 18,9 21,9 27,9 30,9 36,9 42,9 48,9 51,9 54,9 57,9 16.5,12 19.5,12 22.5,12 37.5,12 52.5,12 55.5,12 15,15 60,15 63,15 39.535,16.625 25.5,18 46.5,18 64.5,18 67.5,18 6,21 9,21 66,21 69,21 43.636,22.775 7.5,24 28.5,24 31.5,24 34.5,24 55.5,24 67.5,24 70.5,24 24,27 51,27 54,27 57,27 66,27 69,27 4.5,30 7.5,30 61.5,30 70.5,30 73.5,30 3,33 6,33 9,33 72,33 4.5,36 7.5,36 67.5,36 9,39 69,39 70.5,42 73.5,42 3,45 6,45 9,45 69,45 72,45 4.5,48 7.5,48 67.5,48 73.5,48 6,51 9,51 54,51 57,51 60,51 69,51 13.5,54 52.5,54 55.5,54 61.5,54 64.5,54 67.5,54 9,57 12,57 18,57 51,57 54,57 57,57 60,57 63,57 69,57 10.5,60 13.5,60 19.5,60 52.5,60 55.5,60 58.5,60 61.5,60 64.5,60 67.5,60 15,63 18,63 21,63 24,63 48,63 51,63 57,63 60,63 63,63 16.5,66 19.5,66 22.5,66 25.5,66 34.5,66 40.5,66 43.5,66 46.5,66 49.5,66 52.5,66 58.5,66 18,69 21,69 24,69 30,69 36,69 39,69 42,69 45,69 48,69 51,69 57,69 28.5,72 31.5,72 34.5,72 40.5,72 43.5,72 46.5,72
I/O: U5.23 U6.1 | length 14.7
  Top Layer w0.4: v1(37.5,19.8) 38.075,19.225 38.075,13.428 39.478,12.025 U6.1
  Bottom Layer w0.5: U5.23 36.4,20.9 v1(37.5,19.8)
NetC1_1: C1.1 U1.4 U2.4 | length 10.7
  Top Layer w0.7: C1.1@47.975,22.662 53.638,22.662 54.695,21.605 U1.4 53.395,19.375 U2.4
NetC3_1: C3.1 U5.8 Y1.1 | length 7.1
  Bottom Layer w0.5: U5.8 42.7,12.55 43.625,11.625 Y1.1@44.356,11.625 ; Y1.1 44.325,10.085 C3.1@44.36,10.05
NetC4_1: C4.1 U5.7 Y1.2 | length 5.9
  Bottom Layer w0.5: U5.7 45.306,16.9 46.135,16.071 46.135,15.15 46.135,13.946 Y1.2@46.156,13.925
NetR1_1: R1.1 VD1.2 | length 1
  Top Layer w0.5: R1.1@29.49,19.75 VD1.2
NetR5_2: R5.2 TS1.1 | length 9.8
  Top Layer w0.7: TS1.1 41.42,7.96 R5.2
NetR6_2: R6.2 TS2.1 | length 5.2
  Top Layer w0.7: R6.2 49.978,8.547 TS2.1
NetR7_2: R7.2 TS3.1 | length 5.5
  Top Layer w0.7: R7.2 60.008,13.475 TS3.1
NetR8_2: R8.2 TS4.1 | length 5.1
  Top Layer w0.7: R8.2 70.306,22.95 TS4.1
NetR9_2: R9.2 TS5.1 | length 5.1
  Top Layer w0.7: R9.2 70.81,36.01 TS5.1
NetR10_2: R10.2 TS6.1 | length 5.2
  Top Layer w0.7: R10.2 71.653,50.003 TS6.1
NetR11_2: R11.2 TS7.1 | length 8.1
  Top Layer w0.7: R11.2 TS7.1
NetR12_2: R12.2 TS8.1 | length 5.4
  Top Layer w0.5: R12.2@54.672,65.613 R12.2
  Top Layer w0.7: R12.2@54.672,65.613 TS8.1
NetR13_2: R13.2 TS9.1 | length 11.7
  Top Layer w0.7: R13.2 35.785,71.1 37.565,71.1 TS9.1
NetR14_2: R14.2 TS10.1 | length 4.9
  Top Layer w0.4: R14.2@27.072,67.918 R14.2
  Top Layer w0.7: R14.2@27.072,67.918 TS10.1
NetR15_2: R15.2 TS11.1 | length 5.6
  Top Layer w0.7: TS11.1 16.9,63.767 R15.2
NetR16_2: R16.2 TS12.1 | length 5.6
  Top Layer w0.7: TS12.1 9.068,54.672 R16.2
NetR17_2: R17.2 TS13.1 | length 6.3
  Top Layer w0.7: TS13.1 7.436,41.09 R17.2
NetR18_2: R18.2 TS14.1 | length 5.9
  Top Layer w0.7: TS14.1 8.428,27.072 R18.2
NetR19_2: R19.2 TS15.1 | length 4.9
  Top Layer w0.7: TS15.1 13.883,17.5 R19.2
NetR20_2: R20.2 TS16.1 | length 5.4
  Top Layer w0.7: TS16.1 24.825,8.619 R20.2
RESET: C1.2 R4.1 U5.29 | length 11.5
  Top Layer w0.5: v1(38.9,21.8) 44.95,21.8 v1(45.475,22.325) 45.8,22.65 C1.2
  Bottom Layer w0.5: v1(38.9,21.8) U5.29 ; R4.1 45.095,20.515 45.475,20.895 v1(45.475,22.325)
RX: U1.3 U2.3 U5.30 | length 17.5
  Top Layer w0.5: v1(39.677,24.301) 39.702,24.301 40.277,23.726 v1(48.402,23.726)
  Top Layer w0.8: U1.3 52.125,20.645 U2.3 U2.3@52.16,18.61
  Bottom Layer w0.5: v1(39.677,24.301) 39.677,23.227 39.702,23.202 U5.30@39.7,23.2 ; v1(48.402,23.726) 49.104,23.726 ; U1.3@52.02,20.54 U1.3@52.16,20.4
  Bottom Layer w0.8: 49.104,23.726 U1.3
SCL: R2.1 U3.3 U4.3 U5.28 | length 28.6
  Top Layer w0.4: U4.3 18.15,26.13 18.123,24.49 20.872,21.649 32.646,21.649 33.275,21.019 38.081,21.019 v1(38.1,21)
  Bottom Layer w0.5: v1(38.1,21) U5.28
  Bottom Layer w0.8: U3.3@16.85,28.8 17.25,28.8 18.15,27.9 U4.3
SDA: R3.1 U3.2 U4.2 U5.27 | length 24.7
  Top Layer w0.5: U4.2 19.4,24.35 21.4,22.35 34.523,22.35 35.073,21.8 v1(37.3,21.8)
  Bottom Layer w0.5: U3.2@19.39,28.8 U3.2@19.4,28.79 ; v1(37.3,21.8) U5.27
  Bottom Layer w0.8: U4.2 U3.2@19.4,28.79
TX: U1.2 U2.2 U5.31 | length 14.4
  Top Layer w0.8: U1.2 50.855,19.435 U2.2
  Bottom Layer w0.5: U5.31@40.5,23.2 40.5,23.946 41.004,24.45 45.57,24.45 U1.2@49.62,20.4
pads on no net: U5.9 U5.10 U5.11 U5.12 U5.13 U5.16 U5.17 U5.19 U5.22 U5.24 U5.25 U5.26 U5.32 Y1.
copper on no net: | length 0.1
  Bottom Layer w0.4: 35.7,23.1 35.75,23.15

## Polygon pours and split planes (outlines as drawn)
GND on Bottom Layer "bottom gnd" (solid, remove dead copper, pour order 12): 8.14,14.806 7.013,16.325 5.963,17.896 4.992,19.518 4.1,21.185 3.292,22.894 2.569,24.64 1.932,26.42 1.383,28.228 0.924,30.062 0.555,31.916 0.278,33.786 0.093,35.667 0,37.555 0,38.5 0,39.445 0.093,41.333 0.278,43.214 0.555,45.084 0.924,46.938 1.383,48.772 1.932,50.58 2.569,52.36 3.292,54.106 4.1,55.815 4.992,57.482 5.963,59.104 7.013,60.675 8.14,62.194 9.339,63.655 10.608,65.055 11.945,66.392 13.345,67.661 14.806,68.86 16.325,69.986 17.896,71.037 19.518,72.008 21.185,72.899 22.894,73.708 24.64,74.431 26.42,75.068 28.228,75.617 30.062,76.076 31.916,76.445 33.786,76.722 35.667,76.907 37.555,77 39.445,77 41.333,76.907 43.214,76.722 45.084,76.445 46.938,76.076 48.772,75.617 50.58,75.068 52.36,74.431 54.106,73.708 55.815,72.899 57.482,72.008 59.104,71.037 60.675,69.986 62.194,68.86 63.655,67.661 65.055,66.392 66.392,65.055 67.661,63.655 68.86,62.194 69.986,60.675 71.037,59.104 72.008,57.482 72.899,55.815 73.708,54.106 74.431,52.36 75.068,50.58 75.617,48.772 76.076,46.938 76.445,45.084 76.722,43.214 76.907,41.333 77,39.445 77,37.555 76.907,35.667 76.722,33.786 76.445,31.916 76.076,30.062 75.617,28.228 75.068,26.42 74.431,24.64 73.708,22.894 72.899,21.185 72.008,19.518 71.037,17.896 69.986,16.325 68.86,14.806 67.661,13.345 66.392,11.945 65.055,10.608 63.655,9.339 62.194,8.14 60.675,7.014 59.104,5.963 57.482,4.992 55.815,4.101 54.106,3.292 52.36,2.569 50.58,1.932 48.772,1.383 46.938,0.924 45.084,0.555 43.214,0.278 41.333,0.093 39.445,0 37.555,0 35.667,0.093 33.786,0.278 31.916,0.555 30.062,0.924 28.228,1.383 26.42,1.932 24.64,2.569 22.894,3.292 21.185,4.101 19.518,4.992 17.896,5.963 16.325,7.014 14.806,8.14 13.345,9.339 11.945,10.608 10.608,11.945 9.339,13.345
GND on Top Layer "top gnd" (solid, remove dead copper, pour order 13): 8.14,14.806 7.013,16.325 5.963,17.896 4.992,19.518 4.1,21.185 3.292,22.894 2.569,24.64 1.932,26.42 1.383,28.228 0.924,30.062 0.555,31.916 0.278,33.786 0.093,35.667 0,37.555 0,38.5 0,39.445 0.093,41.333 0.278,43.214 0.555,45.084 0.924,46.938 1.383,48.772 1.932,50.58 2.569,52.36 3.292,54.106 4.1,55.815 4.992,57.482 5.963,59.104 7.013,60.675 8.14,62.194 9.339,63.655 10.608,65.055 11.945,66.392 13.345,67.661 14.806,68.86 16.325,69.986 17.896,71.037 19.518,72.008 21.185,72.899 22.894,73.708 24.64,74.431 26.42,75.068 28.228,75.617 30.062,76.076 31.916,76.445 33.786,76.722 35.667,76.907 37.555,77 39.445,77 41.333,76.907 43.214,76.722 45.084,76.445 46.938,76.076 48.772,75.617 50.58,75.068 52.36,74.431 54.106,73.708 55.815,72.899 57.482,72.008 59.104,71.037 60.675,69.986 62.194,68.86 63.655,67.661 65.055,66.392 66.392,65.055 67.661,63.655 68.86,62.194 69.986,60.675 71.037,59.104 72.008,57.482 72.899,55.815 73.708,54.106 74.431,52.36 75.068,50.58 75.617,48.772 76.076,46.938 76.445,45.084 76.722,43.214 76.907,41.333 77,39.445 77,37.555 76.907,35.667 76.722,33.786 76.445,31.916 76.076,30.062 75.617,28.228 75.068,26.42 74.431,24.64 73.708,22.894 72.899,21.185 72.008,19.518 71.037,17.896 69.986,16.325 68.86,14.806 67.661,13.345 66.392,11.945 65.055,10.608 63.655,9.339 62.194,8.14 60.675,7.014 59.104,5.963 57.482,4.992 55.815,4.101 54.106,3.292 52.36,2.569 50.58,1.932 48.772,1.383 46.938,0.924 45.084,0.555 43.214,0.278 41.333,0.093 39.445,0 37.555,0 35.667,0.093 33.786,0.278 31.916,0.555 30.062,0.924 28.228,1.383 26.42,1.932 24.64,2.569 22.894,3.292 21.185,4.101 19.518,4.992 17.896,5.963 16.325,7.014 14.806,8.14 13.345,9.339 11.945,10.608 10.608,11.945 9.339,13.345

## Silkscreen, mask and mechanical layers (free items; w line width, h text height)
Top Overlay:
  text "DOT. / Ver2" at 53.85,22.2 h5
Bottom Overlay:
  text "DOT. / Ver2" at 63.525,54.075 h5
Mechanical 3:
  circle w0.254: c38.55,38.525 r35.025
  circle w0.254: c38.5,38.525 r32.529
  lines w0.254: 75.6,38.5 cw(c38.55,38.525) 75.6,38.525
size:
  drawing of 249 lines, arcs and shapes, not listed